# Altium PCB TK521_Optisk-plugg.PcbDoc
Units mm, origin at the board's own origin, x right, y up, seen from the top; angles counter-clockwise.
Board outline 16 x 33 mm, 2 copper layers (Top Layer, Bottom Layer); 3 components, 3 nets, 14 pads, 10 vias.
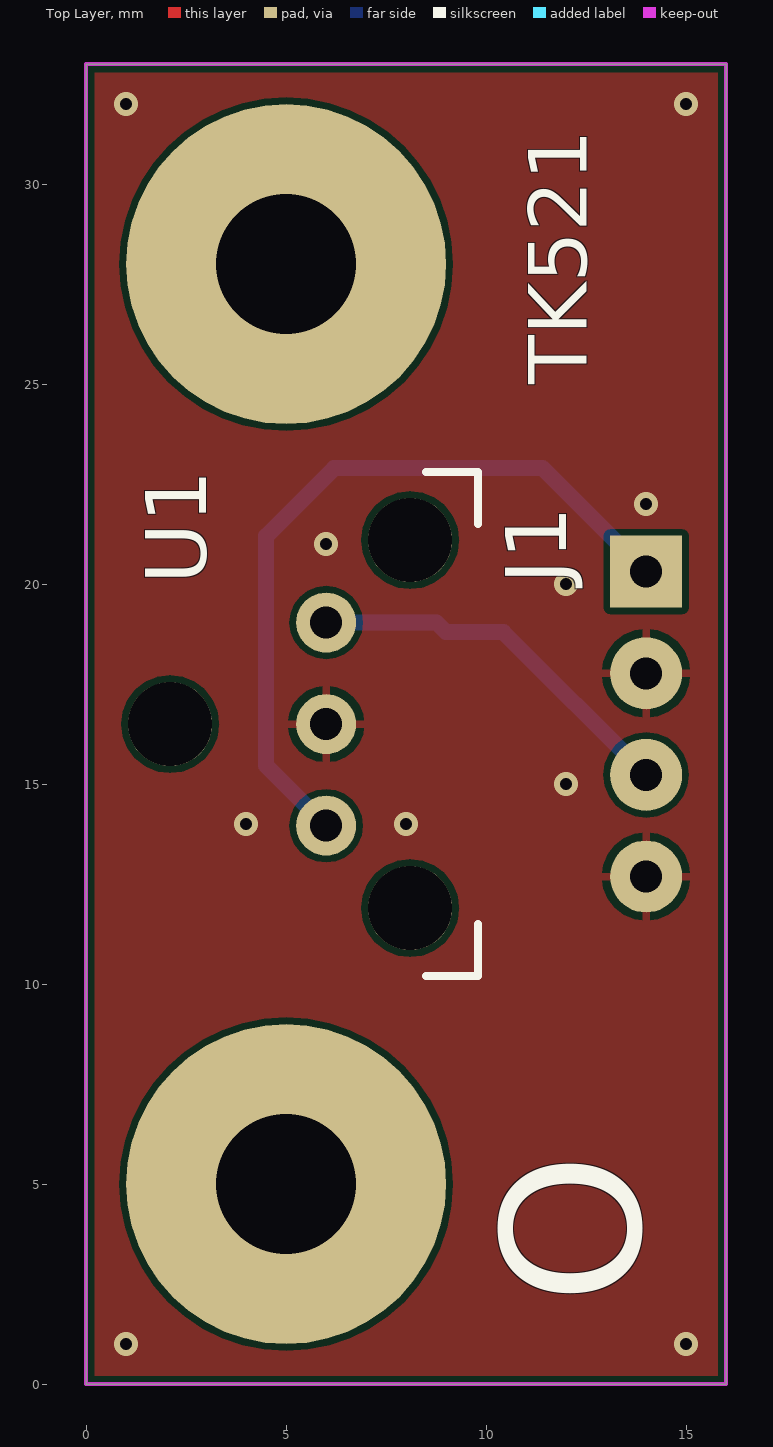
[diagram p0: Top Layer view]
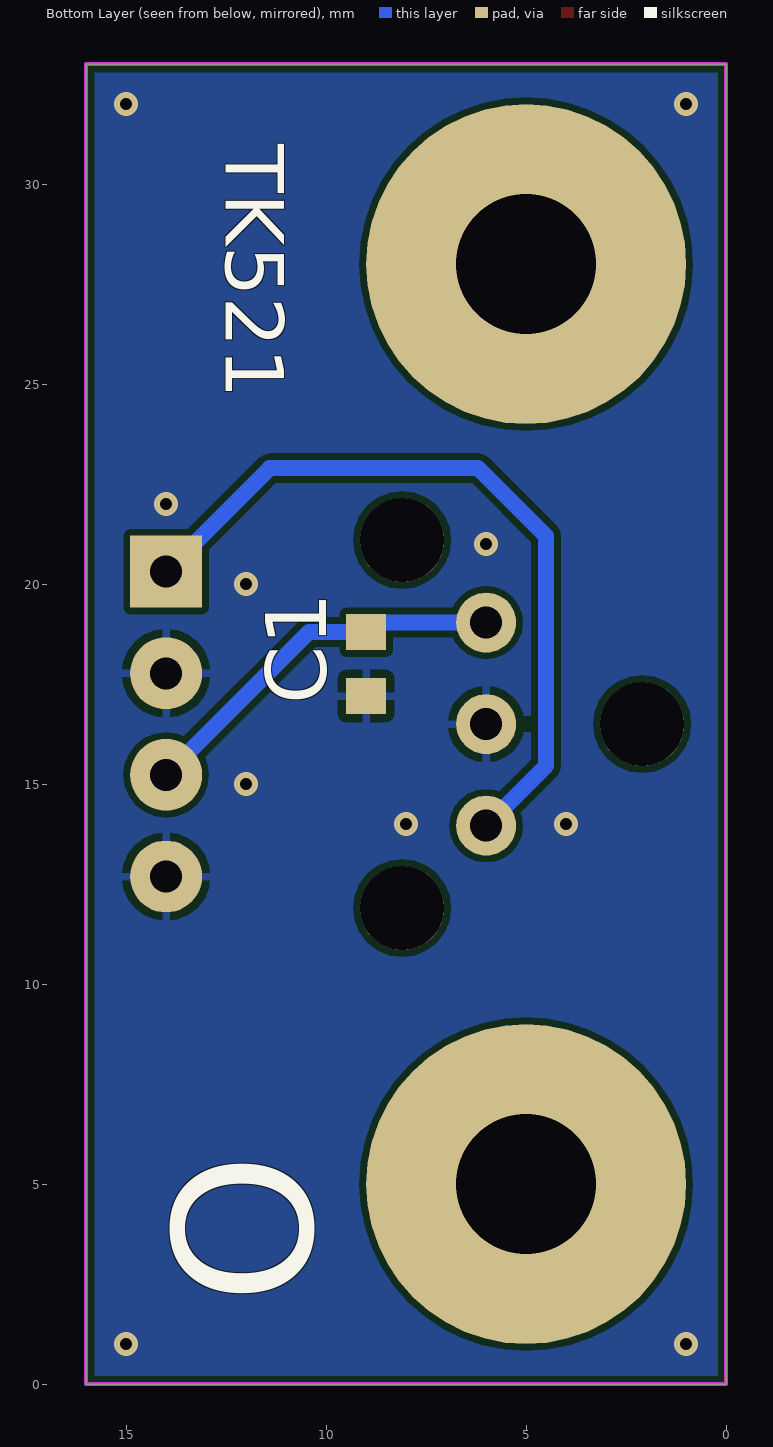
[diagram p1: Bottom Layer view, seen from below]

## Layer stack, top to bottom
Top Solder: solder mask 0.0102, Solder Resist, Dk 3.5
Top Layer: signal copper 0.0356
Dielectric1: dielectric 0.32, FR-4, Dk 4.8
Bottom Layer: signal copper 0.0356
Bottom Solder: solder mask 0.0102, Solder Resist, Dk 3.5

## Board outline
0,0 0,33 16,33 16,0

## Design rules (kind name [scope] priority, off if disabled: settings)
Clearance [All] p1: gap=0.16 ignorepadtopadclearanceinfootprint=FALSE except(0: Arc-Text Arc-Hole Track-Text Track-Hole SMDPad-Text SMDPad-Hole THPad-Text THPad-Hole Via-Text Via-Hole Fill-Text Fill-Hole Poly-Text Poly-Hole Region-Text Region-Hole Text-Text Text-Hole)
Height [All] p1: minheight=0 maxheight=200 prefheight=12.7
HoleSize [All] p1: absolutevalues=TRUE maxlimit=6.35 minlimit=0.3 maxpercent=80.000 minpercent=20.000
MinimumSolderMaskSliver [All] p1: minsoldermaskwidth=0.1
PlaneClearance [All] p1: clearance=1
PlaneConnect [All] p1: planeconnectstyle=Relief reliefexpansion=0.508 reliefentries=4 reliefconductorwidth=1 reliefairgap=0.254
PolygonConnect PolygonConnect_1 [IsVia] p1: connectstyle=Direct reliefconductorwidth=0.254 reliefentries=4 polygonreliefangle="90 Angle" airgapwidth=0.254
PolygonConnect [All] p2: connectstyle=Relief reliefconductorwidth=0.2 reliefentries=4 polygonreliefangle="90 Angle" airgapwidth=0.2
RoutingVias [All] p1: holewidth=0.3 width=0.6 viastyle="Through Hole" minholewidth=0.3 minwidth=0.6 maxholewidth=6.35 maxwidth=10
SilkToSolderMaskClearance [IsPad] p1: minsilkscreentomaskgap=0.178 clearancetoexposedcopper=TRUE
SolderMaskExpansion [All] p1: expansion=0.102
Width [All] p1: maxlimit=10 minlimit=0.16 preferedwidth=0.4
24 further rules are at their usual default settings.

## Components (designator, comment, footprint, x,y, rotation, side; value= is the part's Value field where it differs from the comment)
C1 "100nF" CAPC0603(1608)55_N 9,18 r90 bottom
J1 "JST 4pin" JST_4P 14,16.5 r180 top
U1 "Optical_Reciever" TOSLINK_TH 6,16.5 r180 top

## Footprints (in the part's own frame and the unit in brackets; to place one, negate y for a bottom-side part, rotate by r counter-clockwise, add the part's x,y. Pads: shape width x height; smd on the part's side, far side on the other; paste and mask are expansions set on the pad)
CAPC0603(1608)55_N [mm] "Chip Capacitor, Body 1.6x0.8mm, Height 0.55mm, IPC Medium Density"
  rect 0.9x1 smd: 1(-0.8,0) 2(0.8,0)
  body extent -0.87,-0.48 0.88,0.47, height 0.55
JST_4P [mm]
  rect 1.8x1.8 hole 0.8: 1(0,-3.81)
  round 1.8 hole 0.8: 2(0,-1.27) 3(0,1.27) 4(0,3.81)
  body extent -2.35,-6.2 3.4,6.2, height 7
TOSLINK_TH [mm]
  round 1.5 hole 0.8: 1(0,-2.54) 2(0,0) 3(0,2.54)
  round 2.1 hole 2.1: 4(-2.1,4.6) 4(-2.1,-4.6) 4(3.9,0)
  silkscreen extent -3.8,-6.3 -2.5,6.3, body extent -3.5,-6 10.5,6, height 19.02

## Part data
C1: library part 3028, "X7R 50V 5%", id=3028, leverandor=Farnell, leverandor_varenr=1759122, navn=100nF, nokkelord="Kondensator, Capacitor, CAP", pakke_opprettet="18.02.2015 14.18.13", pakke_opprettet_av=815, pakketype=0603, pris=1, produsent=Multikomp, symbol_opprettet="14.11.2014 20.19.34", symbol_opprettet_av=815
J1: library part 2225, "pris pr. stk.", antall=100, dybde=0, hylle=10, id=2225, kolonne=2, lager_type=Fremlager, navn="JST 4pin", nokkelord="Connector, Kontakt", pakke_opprettet="28.06.2014 18.25.23", pakke_opprettet_av=815, pakketype=TH, pris=2, rad=3, rom=OV, symbol_opprettet="28.06.2014 15.33.28", symbol_opprettet_av=815
U1: library part 2380, "TOSLINK Reciever", id=2380, leverandor=Farnell, leverandor_varenr=1243863, navn=GP1FAV50RK, nokkelord="Optic, fibre, optisk, fiber", pakke_opprettet="28.06.2014 18.02.12", pakke_opprettet_av=815, pakketype=TH, pris=12, produsent=Sharp, symbol_opprettet="28.06.2014 15.42.01", symbol_opprettet_av=815

## Free pads (board coordinates)
  round 8 hole 3.5: 0(5,5) 0(5,28)

## Via types
v1: diameter 0.6, hole 0.3, Top Layer to Bottom Layer, tented both sides, 10 vias

## Nets (pads, with @x,y where several pads share a name; then routed paths per layer and width w, separated by ;. In a path a pad name is that pad's centre, name@x,y a point inside that pad or via, vN(x,y) a via of type N, cw(c..) or ccw(c..) an arc to the next point about the centre after c; other vN are vias at no path point)
GND: C1.1 J1.2 J1.4 U1.2
  other v1: 1,1 15,1 4,14 8,14 12,15 12,20 6,21 14,22 1,32 15,32
NetJ1_1: J1.1 U1.3 | length 19.1
  Bottom Layer w0.4: U1.3 4.5,15.46 4.5,21.2 6.2,22.9 11.41,22.9 J1.1
VCC_P5V0: C1.2 J1.3 U1.1 | length 9.6
  Bottom Layer w0.4: U1.1 8.76,19.04 C1.2 10.43,18.8 J1.3
pads on no net: U1.4

## Polygon pours and split planes (outlines as drawn)
GND on Bottom Layer "B" (solid, pour order 2): 0,0 0,33 16,33 16,0
GND on Top Layer "B" (solid, pour order 4): 0,0 0,33 16,33 16,0

## Keep-outs
Keep-Out Layer:
  the board outline again, w0.1

## Silkscreen, mask and mechanical layers (free items; w line width, h text height)
Top Overlay:
  text "TK521" at 13,25 h2.5 r90
  text "O" at 15,2 h6 r90
Bottom Overlay:
  text "TK521" at 13,31 h2.5 r90
  text "O" at 15,2 h6 r90
Mechanical 1:
  the board outline again, w0.1